# Altium PCB amp_33.PcbDoc
Units mil, origin at the board's own origin, x right, y up, seen from the top; angles counter-clockwise.
Board outline 6000 x 4000 mil, 2 copper layers (Top Layer, Bottom Layer); 16 components, 12 nets, 38 pads, 0 vias.
Unrouted connection lines stored in the file: 6.
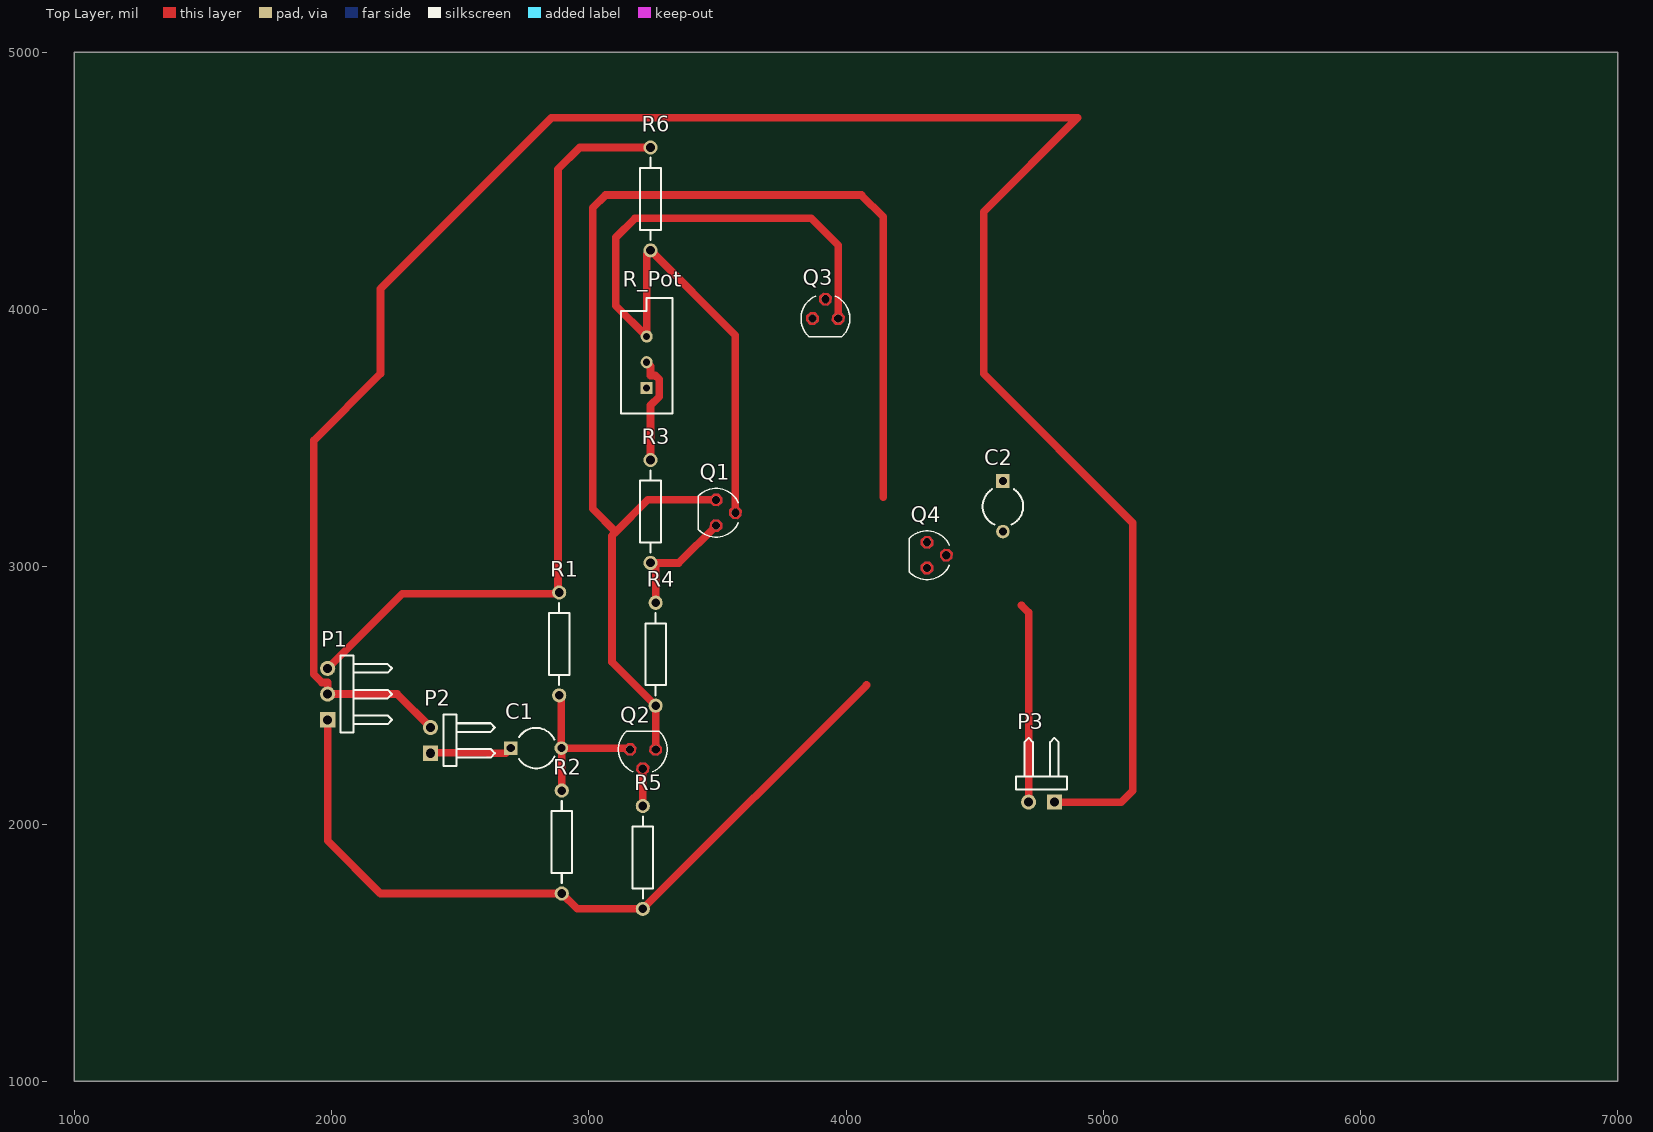
[diagram p0: Top Layer view]
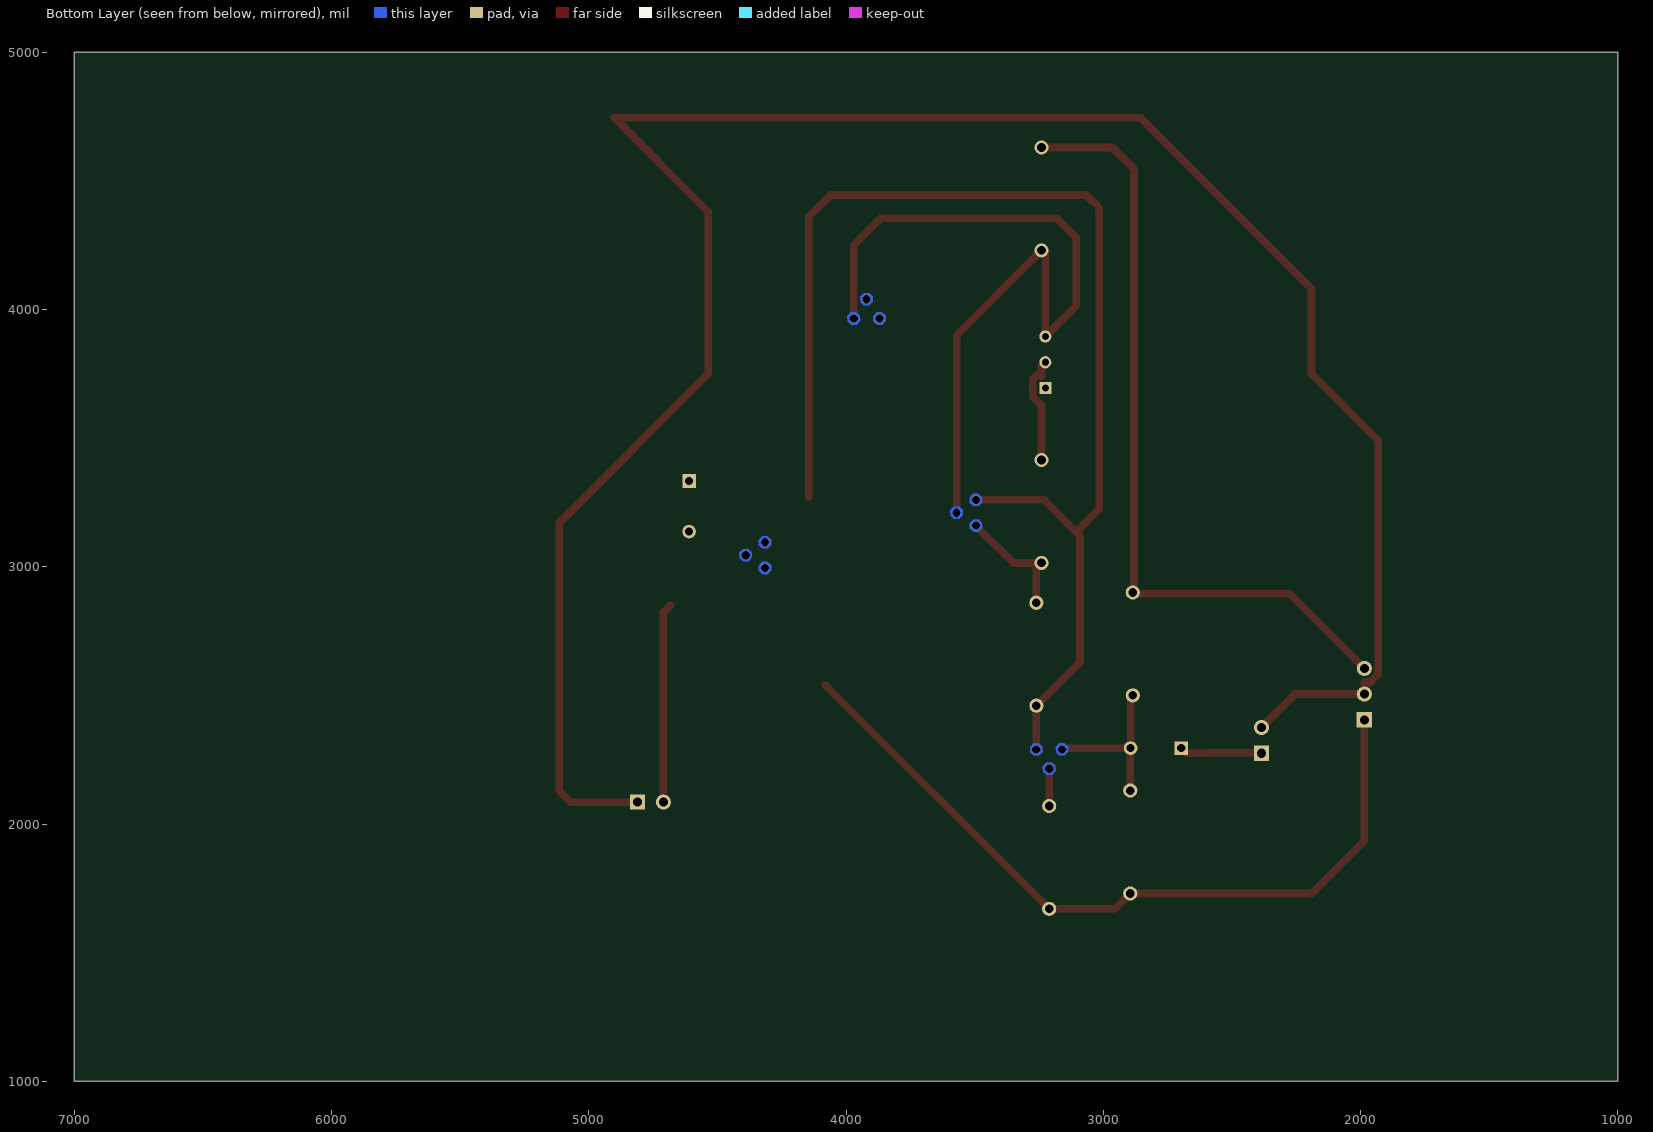
[diagram p1: Bottom Layer view, seen from below]

## Layer stack, top to bottom
Top Solder: solder mask 0.4, Solder Resist, Dk 3.5
Top Layer: signal copper 1.4
Dielectric 1: dielectric 12.6, FR-4, Dk 4.8
Bottom Layer: signal copper 1.4
Bottom Solder: solder mask 0.4, Solder Resist, Dk 3.5

## Board outline
1000,1000 7000,1000 7000,5000 1000,5000

## Design rules (kind name [scope] priority, off if disabled: settings)
Clearance [All] p1: gap=10 ignorepadtopadclearanceinfootprint=FALSE except(0: Arc-Hole Track-Hole SMDPad-Hole THPad-Hole Via-Hole Fill-Hole Poly-Hole Region-Hole Text-Hole)
PolygonConnect [All] p1: connectstyle=Relief reliefconductorwidth=10 reliefentries=4 polygonreliefangle="90 Angle" airgapwidth=10
RoomDefinition Amp_2 [InComponentClass('Amp_2')] p1: confinementstyle=ConfineIn formatcopy=TRUE lockcomponents=FALSE outline 1733.43,1320 5508.43,1320 5508.43,4815 1733.43,4815
RoutingVias [All] p1: holewidth=28 width=50 viastyle="Through Hole" minholewidth=28 minwidth=50 maxholewidth=28 maxwidth=50
SolderMaskExpansion [All] p1: expansion=4
Width [All] p1: maxlimit=30 minlimit=10 preferedwidth=30 toplayer_minwidth=30 bottomlayer_maxwidth=10 bottomlayer_prefwidth=10 minimp=50.000000 maximp=50.000000 favimp=50.000000
30 further rules are at their usual default settings.

## Components (designator, comment, footprint, x,y, rotation, side; value= is the part's Value field where it differs from the comment)
C1 "Cap2" CAPR5-4X5 2795,2295 r0 top value=100pF
C2 "Cap2" CAPR5-4X5 4610,3235 r270 top value=100pF
P1 "Header 3H" HDR1X3H 1985,2405 r90 top
P2 "Header 2H" HDR1X2H 2385,2275 r90 top
P3 "Header 2H" HDR1X2H 4810,2085 r180 top
Q1 "BC639" *SOT54D_BC639(Primary) 3495,3210 r270 top
Q2 "BC640" *SOT54D_BC640(Primary) 3210,2290 r180 top
Q3 "BC639" *SOT54D_BC639(Primary) 3920,3965 r0 top
Q4 "BC640" *SOT54D_BC640(Primary) 4315,3045 r270 top
R1 "Res2" AXIAL-0.4 2885,2700 r90 top value=22k
R2 "Res2" AXIAL-0.4 2895,1930 r90 top value=15k
R3 "Res2" AXIAL-0.4 3240,3215 r90 top value=2.2k
R4 "Res2" AXIAL-0.4 3260,2660 r90 top value=4.7k
R5 "Res2" AXIAL-0.4 3210,1870 r90 top value=4.7k
R6 "Res2" AXIAL-0.4 3240,4430 r90 top value=10k
R_Pot "RPot" VR5 3225,3795 r90 top value=10k

## Footprints (in the part's own frame and the unit in brackets; to place one, negate y for a bottom-side part, rotate by r counter-clockwise, add the part's x,y. Pads: shape width x height; smd on the part's side, far side on the other; paste and mask are expansions set on the pad)
*SOT54D_BC639(Primary) [mil]
  round 32 hole 32: B(50,0) C(0,75) E(-50,0)
  Top Layer region: -25.57,8.89 -39.01,23.56 -58.89,24.43 -73.56,10.99 -74.43,-8.89 -60.99,-23.56 -41.11,-24.43 -26.44,-10.99
  Top Layer region: 24.43,83.89 10.99,98.56 -8.89,99.43 -23.56,85.99 -24.43,66.11 -10.99,51.44 8.89,50.57 23.56,64.01
  Top Layer region: 74.43,8.89 60.99,23.56 41.11,24.43 26.44,10.99 25.57,-8.89 39.01,-23.56 58.89,-24.43 73.56,-10.99
  Bottom Layer region: -25.57,8.89 -39.01,23.56 -58.89,24.43 -73.56,10.99 -74.43,-8.89 -60.99,-23.56 -41.11,-24.43 -26.44,-10.99
  Bottom Layer region: 24.43,83.89 10.99,98.56 -8.89,99.43 -23.56,85.99 -24.43,66.11 -10.99,51.44 8.89,50.57 23.56,64.01
  Bottom Layer region: 74.43,8.89 60.99,23.56 41.11,24.43 26.44,10.99 25.57,-8.89 39.01,-23.56 58.89,-24.43 73.56,-10.99
  Multi-Layer region: -25.57,8.89 -39.01,23.56 -58.89,24.43 -73.56,10.99 -74.43,-8.89 -60.99,-23.56 -41.11,-24.43 -26.44,-10.99
  Multi-Layer region: 24.43,83.89 10.99,98.56 -8.89,99.43 -23.56,85.99 -24.43,66.11 -10.99,51.44 8.89,50.57 23.56,64.01
  Multi-Layer region: 74.43,8.89 60.99,23.56 41.11,24.43 26.44,10.99 25.57,-8.89 39.01,-23.56 58.89,-24.43 73.56,-10.99
  silkscreen extent -95,-70 95,87
*SOT54D_BC640(Primary) [mil]
  round 32 hole 32: B(50,0) C(0,75) E(-50,0)
  Top Layer region: -25.57,8.89 -39.01,23.56 -58.89,24.43 -73.56,10.99 -74.43,-8.89 -60.99,-23.56 -41.11,-24.43 -26.44,-10.99
  Top Layer region: 24.43,83.89 10.99,98.56 -8.89,99.43 -23.56,85.99 -24.43,66.11 -10.99,51.44 8.89,50.57 23.56,64.01
  Top Layer region: 74.43,8.89 60.99,23.56 41.11,24.43 26.44,10.99 25.57,-8.89 39.01,-23.56 58.89,-24.43 73.56,-10.99
  Bottom Layer region: -25.57,8.89 -39.01,23.56 -58.89,24.43 -73.56,10.99 -74.43,-8.89 -60.99,-23.56 -41.11,-24.43 -26.44,-10.99
  Bottom Layer region: 24.43,83.89 10.99,98.56 -8.89,99.43 -23.56,85.99 -24.43,66.11 -10.99,51.44 8.89,50.57 23.56,64.01
  Bottom Layer region: 74.43,8.89 60.99,23.56 41.11,24.43 26.44,10.99 25.57,-8.89 39.01,-23.56 58.89,-24.43 73.56,-10.99
  Multi-Layer region: -25.57,8.89 -39.01,23.56 -58.89,24.43 -73.56,10.99 -74.43,-8.89 -60.99,-23.56 -41.11,-24.43 -26.44,-10.99
  Multi-Layer region: 24.43,83.89 10.99,98.56 -8.89,99.43 -23.56,85.99 -24.43,66.11 -10.99,51.44 8.89,50.57 23.56,64.01
  Multi-Layer region: 74.43,8.89 60.99,23.56 41.11,24.43 26.44,10.99 25.57,-8.89 39.01,-23.56 58.89,-24.43 73.56,-10.99
  silkscreen extent -95,-70 95,87
AXIAL-0.4 [mm] "Axial Device, Thru-Hole; 2 Leads; 0.4 in Pin Spacing"
  round 1.4 hole 0.85: 1(-5.08,0) 2(5.08,0)
  silkscreen extent -4.06,-1.02 4.06,1.02
CAPR5-4X5 [mm] "Capacitor; 2 Leads"
  rect 1.35x1.35 hole 0.8: 1(-2.5,0)
  round 1.35 hole 0.8: 2(2.5,0)
  silkscreen extent -1.69,-2 1.82,2
HDR1X2H [mm] "Connector; Header; 2 Position; Right Angle"
  rect 1.5x1.5 hole 0.9: 1(0,0)
  round 1.5 hole 0.9: 2(2.54,0)
  silkscreen extent -1.27,-6.35 3.81,-1.27
HDR1X3H [mm] "Connector; Header; 3 Position; Right Angle"
  rect 1.5x1.5 hole 0.9: 1(0,0)
  round 1.5 hole 0.9: 2(2.54,0) 3(5.08,0)
  silkscreen extent -1.27,-6.35 6.35,-1.27
VR5 [mm] "Thru-Hole; 3 Leads"
  rect 1.2x1.2 hole 0.7: 1(-2.54,0)
  round 1.2 hole 0.7: 2(0,0) 3(2.54,0)
  silkscreen extent -5.08,-2.54 6.35,2.54

## Part data
C1 C2: "Capacitor", PackageDescription="Capacitor; 2 Leads", PackageReference=CAPR5-4X5, Published=23-Sep-2002, Publisher="Altium Limited"
P1: "Header, 3-Pin, Right Angle", LatestRevisionDate=17-Jul-2002, LatestRevisionNote="Re-released for DXP Platform.", Publisher="Altium Limited"
P2 P3: "Header, 2-Pin, Right Angle", LatestRevisionDate=17-Jul-2002, LatestRevisionNote="Re-released for DXP Platform.", Publisher="Altium Limited"
Q1 Q3: "Bipolar _BJT_ Transistor NPN 80V 1A 200MHz 625mW Through Hole TO-92-3", Package="TO-92 Continental Device", Availability=Unavailable, MF="ON Semiconductor", MP=BC639, Price=None, SnapEDA_Link=https://www.snapeda.com/parts/BC639/ON%20Semiconductor/view-part/761111/?ref=snap
Q2 Q4: "Bipolar _BJT_ Transistor PNP 80V 500mA 150MHz 625mW Through Hole TO-92-3", Package="TO-92 Continental Device", Availability=Unavailable, MF="ON Semiconductor", MP=BC640, Price=None, SnapEDA_Link=https://www.snapeda.com/parts/BC640/ON%20Semiconductor/view-part/2782146/?ref=snap
R1 R2 R3 R4 R5 R6: "Resistor", LatestRevisionDate=17-Jul-2002, LatestRevisionNote="Re-released for DXP Platform.", PackageDescription="Axial Device, Thru-Hole; 2 Leads; 0.4 in Pin Spacing", PackageReference=AXIAL-0.4, Published=8-Jun-2000, Publisher="Altium Limited"
R_Pot: "Potentiometer", LatestRevisionDate=17-Jul-2002, LatestRevisionNote="Re-released for DXP Platform.", PackageDescription="Variable Resistor, Thru-Hole; 3 Leads", PackageReference=VR5, Published=8-Jun-2000, Publisher="Altium Limited", Set Position=0.5, Sim Note="Enter the Resistance value and the set point into parameter fields."

## Nets (pads, with @x,y where several pads share a name; then routed paths per layer and width w, separated by ;. In a path a pad name is that pad's centre, name@x,y a point inside that pad or via, vN(x,y) a via of type N, cw(c..) or ccw(c..) an arc to the next point about the centre after c; other vN are vias at no path point)
NetC1_1: C1.1 P2.1 | length 321.2
  Top Layer w30: P2.1 2386.57,2276.57 2606.57,2276.57 2608.14,2275 2676.57,2275 C1.1
NetC1_2: C1.2 Q2.B R1.1 R2.2 | length 642.8
  Top Layer w30: R1.1 2893.43,2491.57 C1.2 ; R2.2 2895,2293.43 C1.2 ; Q2.B 3155,2295 C1.2
NetC2_1: C2.1 Q3.E Q4.E
NetC2_2: C2.2 P3.2 | length 776.7
  Top Layer w30: 4681.85,2850 4710,2821.85 P3.2
NetP1_1: P1.1 Q4.C R2.1 R5.1 | length 3035.1
  Top Layer w30: P1.1 1985,1935 2190,1730 R2.1 2955,1670 R5.1 4080,2540
NetP1_2: P1.2 P2.2 P3.1 | length 8487.7
  Top Layer w30: P2.2 2255,2505 P1.2 1985,2550.47 1962.41,2550.47 1930.47,2582.41 1930.47,3490.47 2190,3750 2190,4080 2855,4745 4900,4745 4535,4380 4535,3750 5115,3170 5115,2130 5070,2085 P3.1
NetP1_3: P1.3 Q3.C R1.2 R6.2 | length 3064.5
  Top Layer w30: P1.3 2275,2895 2880,2895 R1.2 2880,2905 2880,4545 2965,4630 R6.2
NetQ1_B: Q1.B R3.1 R4.2 | length 478.3
  Top Layer w30: R4.2 3260,2995 R3.1 3350,3015 Q1.B
NetQ1_C: Q1.C Q3.B R6.1 R_Pot.3 | length 3157.2
  Top Layer w30: Q1.C 3570,3900 R6.1 3225,4215 R_Pot.3 3105,4015 3105,4280 3180,4355 3865,4355 3970,4250 Q3.B
NetQ1_E: Q1.E Q2.E Q4.B R4.1 | length 4936.6
  Top Layer w30: Q2.E R4.1 3090,2630 3090,3120 3105,3135 ; Q1.E 3230,3260 3105,3135 ; 4145,3270 4145,4360 4060,4445 3065,4445 3015,4395 3015,3225 3105,3135
NetQ2_C: Q2.C R5.2 | length 145
  Top Layer w30: R5.2 Q2.C
NetR3_2: R3.2 R_Pot.2 | length 425.2
  Top Layer w30: R_Pot.2 3240,3780 3240,3743.62 3258.98,3743.62 3273.62,3728.98 3273.62,3661.02 3240,3627.4 R3.2
pads on no net: R_Pot.1